# EAGLE board C64 Rom Selector - ATTiny85 (EAGLE 9.6.1)
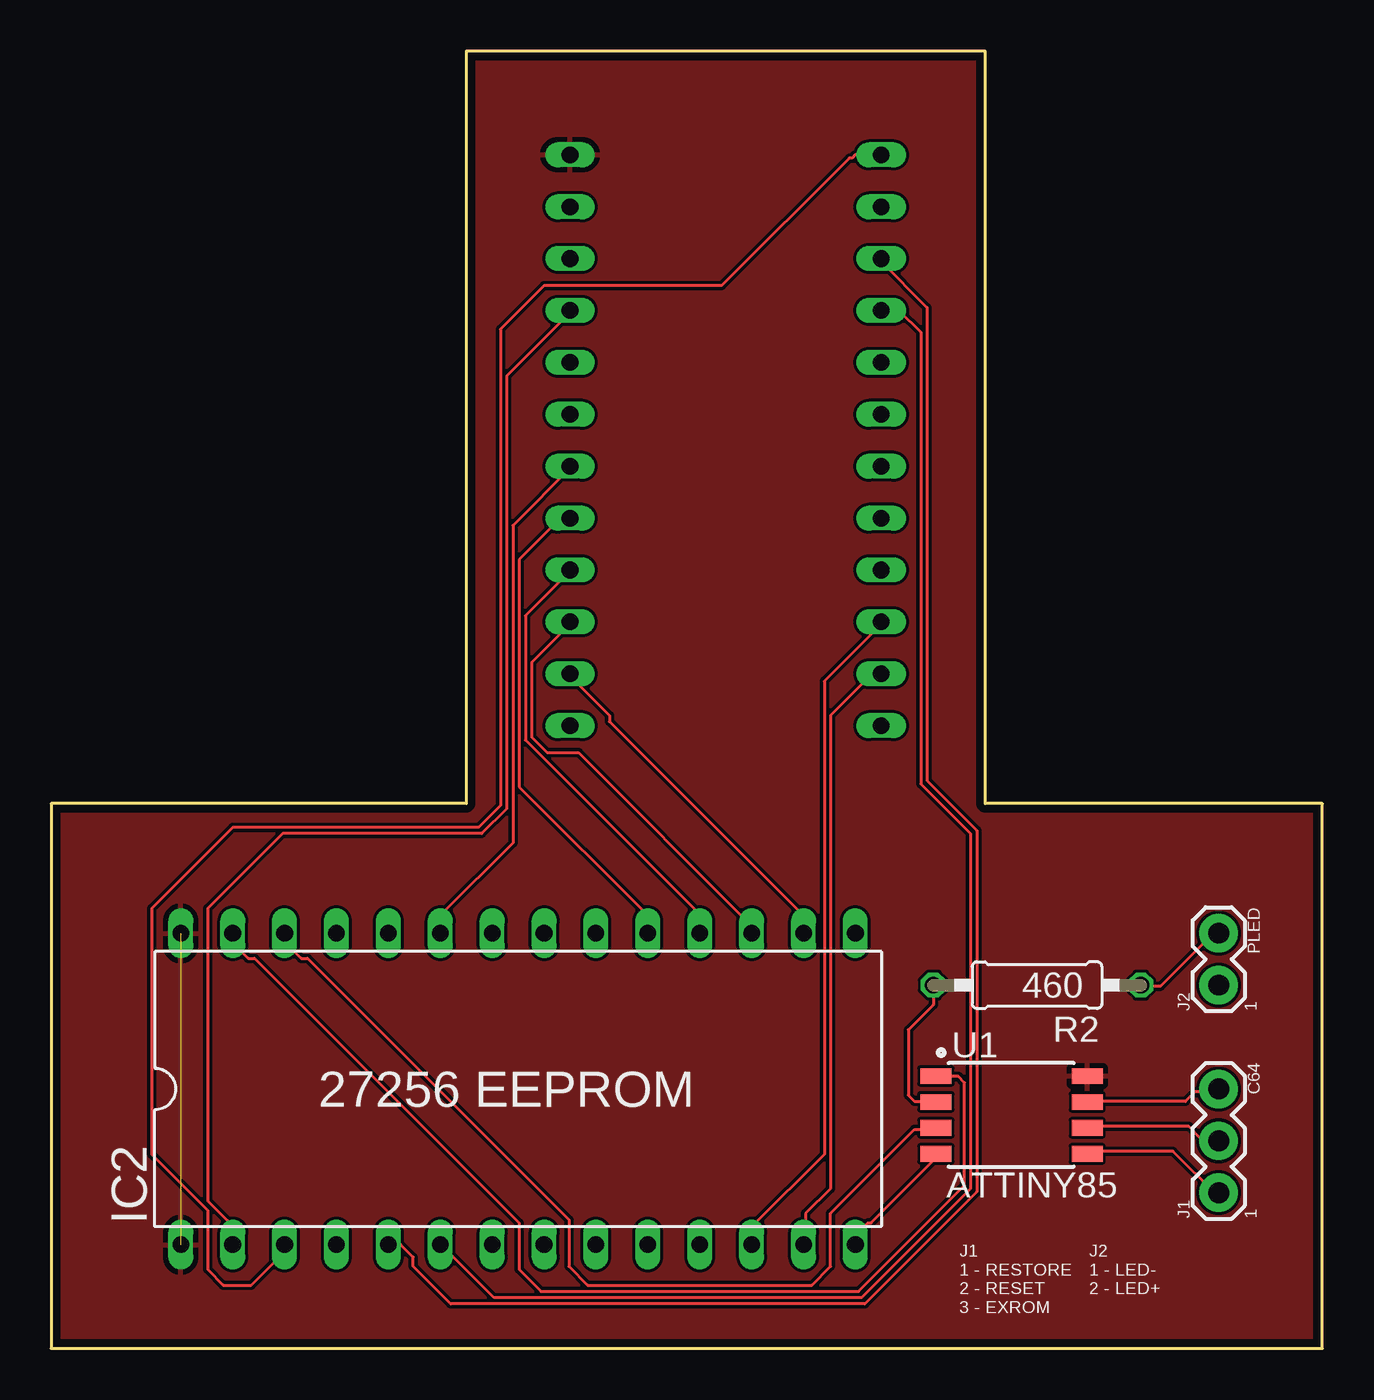
[diagram p0: board, top side]
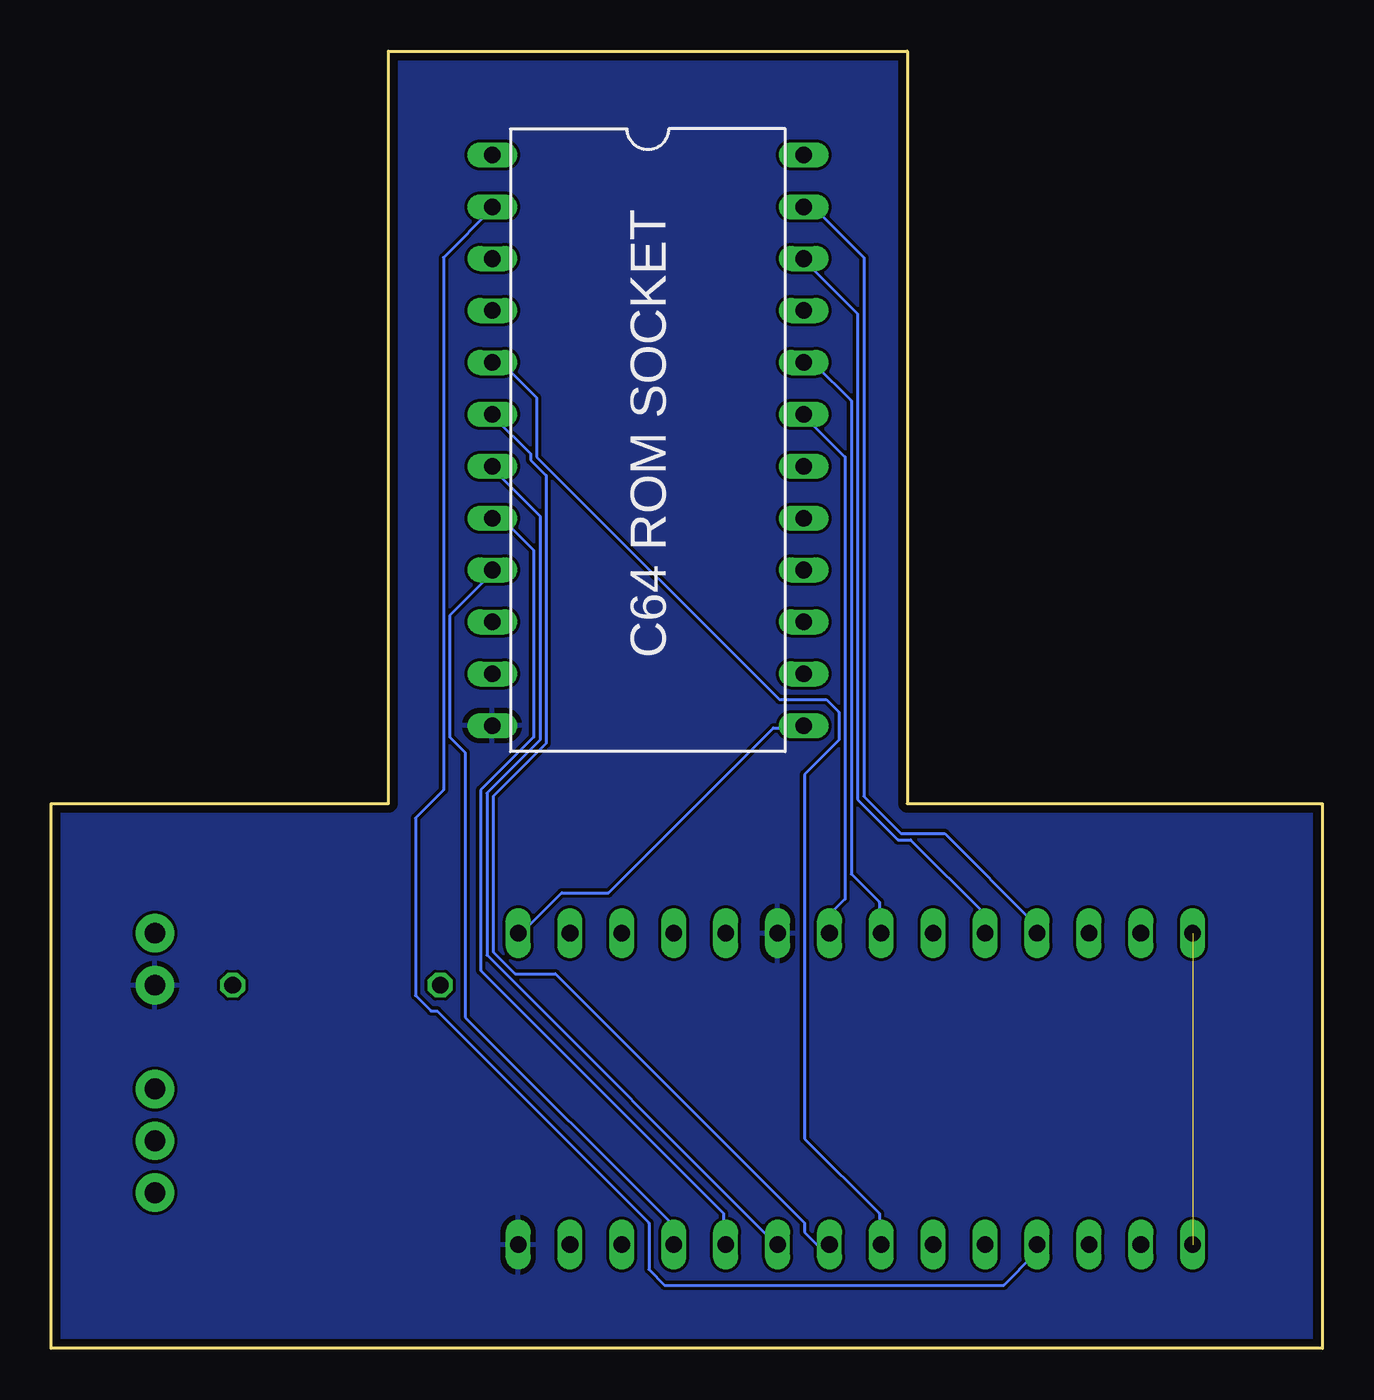
[diagram p1: board, bottom side, seen from below]

Size 62.23 x 63.5 mm. Coordinates in mm from the lower left corner, seen from the top.
Outline: 0,0 62.23,0 62.23,26.67 45.72,26.67 45.72,63.5 20.32,63.5 20.32,26.67 0,26.67 0,0
Copper layers (1*16): Top 0.035559375mm / dielectric 1.6mm / Bottom 0.035559375mm
Design rules "oshpark-2layer": minimum track width 6mil, minimum drill 10mil, track to track 6mil, track to pad 6mil, pad to pad 6mil, via to via 6mil, smd to smd 6mil, copper to edge 15mil, drill to drill 6mil, minimum pad ring 5mil, minimum via ring 5mil, stop-mask expansion 2.5mil, vias tented up to drill 0mil, thermal gap 10mil

## Footprints (pad centres in the part's own frame; a part is rotated, then mirrored left to right if it is on the bottom)
DIL24 = drill 0.813 long: 1 -13.97,-7.62; 2 -11.43,-7.62; 3 -8.89,-7.62; 4 -6.35,-7.62; 5 -3.81,-7.62; 6 -1.27,-7.62; 7 1.27,-7.62; 8 3.81,-7.62; 9 6.35,-7.62; 10 8.89,-7.62; 11 11.43,-7.62; 12 13.97,-7.62; 13 13.97,7.62; 14 11.43,7.62; 15 8.89,7.62; 16 6.35,7.62; 17 3.81,7.62; 18 1.27,7.62; 19 -1.27,7.62; 20 -3.81,7.62; 21 -6.35,7.62; 22 -8.89,7.62; 23 -11.43,7.62; 24 -13.97,7.62
DIL28 = drill 0.813 long: 1 -16.51,-7.62; 2 -13.97,-7.62; 3 -11.43,-7.62; 4 -8.89,-7.62; 5 -6.35,-7.62; 6 -3.81,-7.62; 7 -1.27,-7.62; 8 1.27,-7.62; 9 3.81,-7.62; 10 6.35,-7.62; 11 8.89,-7.62; 12 11.43,-7.62; 13 13.97,-7.62; 14 16.51,-7.62; 15 16.51,7.62; 16 13.97,7.62; 17 11.43,7.62; 18 8.89,7.62; 19 6.35,7.62; 20 3.81,7.62; 21 1.27,7.62; 22 -1.27,7.62; 23 -3.81,7.62; 24 -6.35,7.62; 25 -8.89,7.62; 26 -11.43,7.62; 27 -13.97,7.62; 28 -16.51,7.62
1X03 = drill 1.016 pad 1.88: 1 0,0; 2 2.54,0; 3 5.08,0
1X02 = drill 1.016 pad 1.88: 1 0,0; 2 2.54,0
0207/10 = drill 0.813 octagon: 1 -5.08,0; 2 5.08,0
ATTINY85 = smd 1.524 x 0.762: 1 -3.683,1.905; 2 -3.683,0.635; 3 -3.683,-0.635; 4 -3.683,-1.905; 5 3.727,-1.905; 6 3.727,-0.635; 7 3.727,0.635; 8 3.727,1.905

## Placement (x,y rotation side)
IC1  C64 ROM SOCKET  [DIL24]  33.02,44.45 270 bottom
IC2  27256 EEPROM  [DIL28]  22.86,12.7 0 top
J1  C64  [1X03]  57.15,7.62 90 top
J2  PLED  [1X02]  57.15,17.78 90 top
R2  460  [0207/10]  48.26,17.78 180 top
U1  ATTINY85  [ATTINY85]  46.99,11.43 0 top

## Library data of the parts
IC1 IC2 = myparts
J1 J2 = SparkFun-Connectors
R2 = rcl; SPICEPREFIX: R
U1 = SparkFun-IC-Microcontroller; PROD_ID: IC-09092

## Nets
!CE: IC1.20 IC2.22
A0: IC1.8 IC2.10
A1: IC1.7 IC2.9
A2: IC1.6 IC2.8
A3: IC1.5 IC2.7
A4: IC1.4 IC2.6
A5: IC1.3 IC2.5
A6: IC1.2 IC2.4
A7: IC1.1 IC2.3
A8: IC1.23 IC2.25
A9: IC1.22 IC2.24
A10: IC1.19 IC2.21
A11: IC1.18 IC2.23
A12: IC1.21 IC2.2
A13: IC2.26 U1.3
A14: IC2.27 U1.1
D0: IC1.9 IC2.11
D1: IC1.10 IC2.12
D2: IC1.11 IC2.13
D3: IC1.13 IC2.15
D4: IC1.14 IC2.16
D5: IC1.15 IC2.17
D6: IC1.16 IC2.18
D7: IC1.17 IC2.19
EXROM: J1.3 U1.7
GND: IC1.12 IC2.14 IC2.20 J2.1 U1.4
PLED: R2.2 U1.2
PLED+: J2.2 R2.1
RESET: J1.2 U1.6
RESTORE: J1.1 U1.5
VCC: IC1.24 IC2.1 IC2.28 U1.8

## Tracks (layer width: path | path; a pad name or v marks a point on that pad's centre or on a via)
!CE
  Bottom 0.152: IC2.22 21.69,20.32 21.69,21.84 23.06,23.22 23.06,46.38 24.89,48.21 25.35,48.21 IC1.20
A0
  Bottom 0.152: IC2.10 29.31,5.08 29.31,6.6 41.2,18.49 41.2,27.33 38.61,29.92 38.61,39.07 40.13,40.59 40.59,40.59 IC1.8
A1
  Bottom 0.152: IC2.9 26.72,5.08 40.89,19.25 40.89,27.18 38.3,29.77 38.3,40.74 40.74,43.18 IC1.7
A2
  Bottom 0.152: IC2.8 24.74,5.08 25.35,5.69 25.35,6.15 37.54,18.34 39.52,18.34 40.59,19.41 40.59,27.03 38,29.62 38,42.72 38.76,43.49 38.76,43.79 40.59,45.62 IC1.6
A3
  Bottom 0.152: IC2.7 21.69,5.08 21.69,6.6 25.35,10.26 25.35,28.09 23.67,29.77 23.67,31.14 24.28,31.75 26.57,31.75 38.46,43.64 38.46,46.53 40.13,48.21 40.59,48.21 IC1.5
A4
  Top 0.152: IC1.4 41.5,50.8 42.57,49.73 42.57,27.63 45.01,25.2 45.01,7.82 39.68,2.49 21.69,2.49 19.1,5.08 IC2.6
A5
  Top 0.152: IC2.5 17.12,5.08 17.73,4.47 17.73,4.01 19.56,2.18 39.83,2.18 45.31,7.67 45.31,25.35 42.88,27.79 42.88,50.95 40.59,53.24 IC1.3
A6
  Bottom 0.152: IC2.4 14.07,5.08 14.07,4.62 15.6,3.1 32.21,3.1 32.97,3.86 32.97,6.15 43.33,16.51 43.64,16.51 44.4,17.27 44.4,25.96 43.03,27.33 43.03,53.39 40.59,55.83 IC1.2
A7
  Top 0.152: IC1.1 39.37,58.42 39.22,58.27 39.07,58.27 32.82,52.02 24.13,52.02 22,49.89 22,26.57 20.93,25.5 8.89,25.5 4.93,21.54 4.93,9.5 7.67,6.76 7.67,3.86 8.43,3.1 9.8,3.1 11.33,4.62 11.33,5.08 IC2.3
A8
  Bottom 0.152: IC2.25 14.07,20.32 14.07,20.78 18.49,25.2 20.62,25.2 22.45,27.03 22.45,53.39 24.89,55.83 25.35,55.83 IC1.23
A9
  Bottom 0.152: IC2.24 16.51,21.23 20.17,24.89 20.78,24.89 22.76,26.87 22.76,50.65 25.35,53.24 IC1.22
A10
  Bottom 0.152: IC2.21 24.13,21.23 23.37,22 23.37,43.64 25.35,45.62 IC1.19
A11
  Top 0.152: IC2.23 19.1,20.32 19.1,21.23 22.61,24.74 22.61,40.28 25.5,43.18 IC1.18
A12
  Top 0.152: IC2.2 8.89,5.99 7.67,7.21 7.67,21.54 11.33,25.2 21.08,25.2 22.3,26.42 22.3,47.6 25.5,50.8 IC1.21
A13
  Top 0.152: U1.3 43.18,10.72 42.27,10.72 38.15,6.6 38.15,4.01 37.24,3.1 26.26,3.1 25.35,4.01 25.35,6.3 12.55,19.1 12.24,19.1 11.48,19.86 11.48,20.32 IC2.26
A14
  Top 0.152: IC2.27 8.89,19.86 9.65,19.1 9.96,19.1 22.91,6.15 22.91,3.86 23.98,2.79 39.52,2.79 44.7,7.98 44.7,13 44.4,13.31 43.33,13.31 U1.1
D0
  Bottom 0.152: IC2.11 31.75,5.99 41.96,16.21 41.96,29.16 42.72,29.92 42.72,35.87 40.59,38 IC1.9
D1
  Top 0.152: IC2.12 34.34,5.08 34.34,5.99 37.85,9.5 37.85,32.66 40.74,35.56 IC1.10
D2
  Top 0.152: IC2.13 36.93,5.08 36.93,6.6 38.15,7.82 38.15,30.99 40.13,32.97 40.59,32.97 IC1.11
D3
  Bottom 0.152: IC2.15 39.22,20.32 37.24,22.3 34.95,22.3 26.87,30.38 25.5,30.38 IC1.13
D4
  Top 0.152: IC2.16 36.78,20.32 36.78,21.23 27.33,30.68 27.33,30.99 25.35,32.97 IC1.14
D5
  Top 0.152: IC2.17 34.19,20.32 34.19,20.78 25.81,29.16 24.28,29.16 23.52,29.92 23.52,33.58 25.5,35.56 IC1.15
D6
  Top 0.152: IC2.18 31.75,21.23 23.22,29.77 23.22,35.87 25.35,38 IC1.16
D7
  Top 0.152: IC2.19 29.16,20.32 29.16,21.23 22.91,27.48 22.91,38.61 24.89,40.59 25.35,40.59 IC1.17
EXROM
  Top 0.152: U1.7 50.8,12.09 55.52,12.09 55.98,12.55 56.9,12.55 57.05,12.7 J1.3
GND
  Top 0.152: IC2.14 39.37,5.54 39.98,6.15 40.13,6.15 43.18,9.2 43.18,9.5 U1.4
  pour Bottom: 0,0 62.23,0 62.23,26.67 45.72,26.67 45.72,63.5 20.32,63.5 20.32,26.67 0,26.67
PLED
  Top 0.152: R2.2 43.18,16.82 41.96,15.6 41.96,12.39 42.27,12.09 43.18,12.09 U1.2
PLED+
  Top 0.152: J2.2 56.9,20.32 54.3,17.73 53.39,17.73 R2.1
RESET
  Top 0.152: U1.6 50.8,10.87 55.68,10.87 56.29,10.26 57.05,10.26 J1.2
RESTORE
  Top 0.152: U1.5 50.8,9.65 54.92,9.65 57.05,7.52 J1.1
VCC  (1 unrouted)
  pour Top: 0,0 62.23,0 62.23,26.67 45.72,26.67 45.72,63.5 20.32,63.5 20.32,26.67 0,26.67

## Text on the board
tPlace: 1 | 1 | J1 / 1 - RESTORE / 2 - RESET / 3 - EXROM | J2 / 1 - LED- / 2 - LED+